# Altium PCB DE-060418.PcbDoc
Units mm, origin at the board's own origin, x right, y up, seen from the top; angles counter-clockwise.
Board outline 40 x 60 mm, 2 copper layers (Top Layer, Bottom Layer); 53 components, 43 nets, 141 pads, 14 vias.
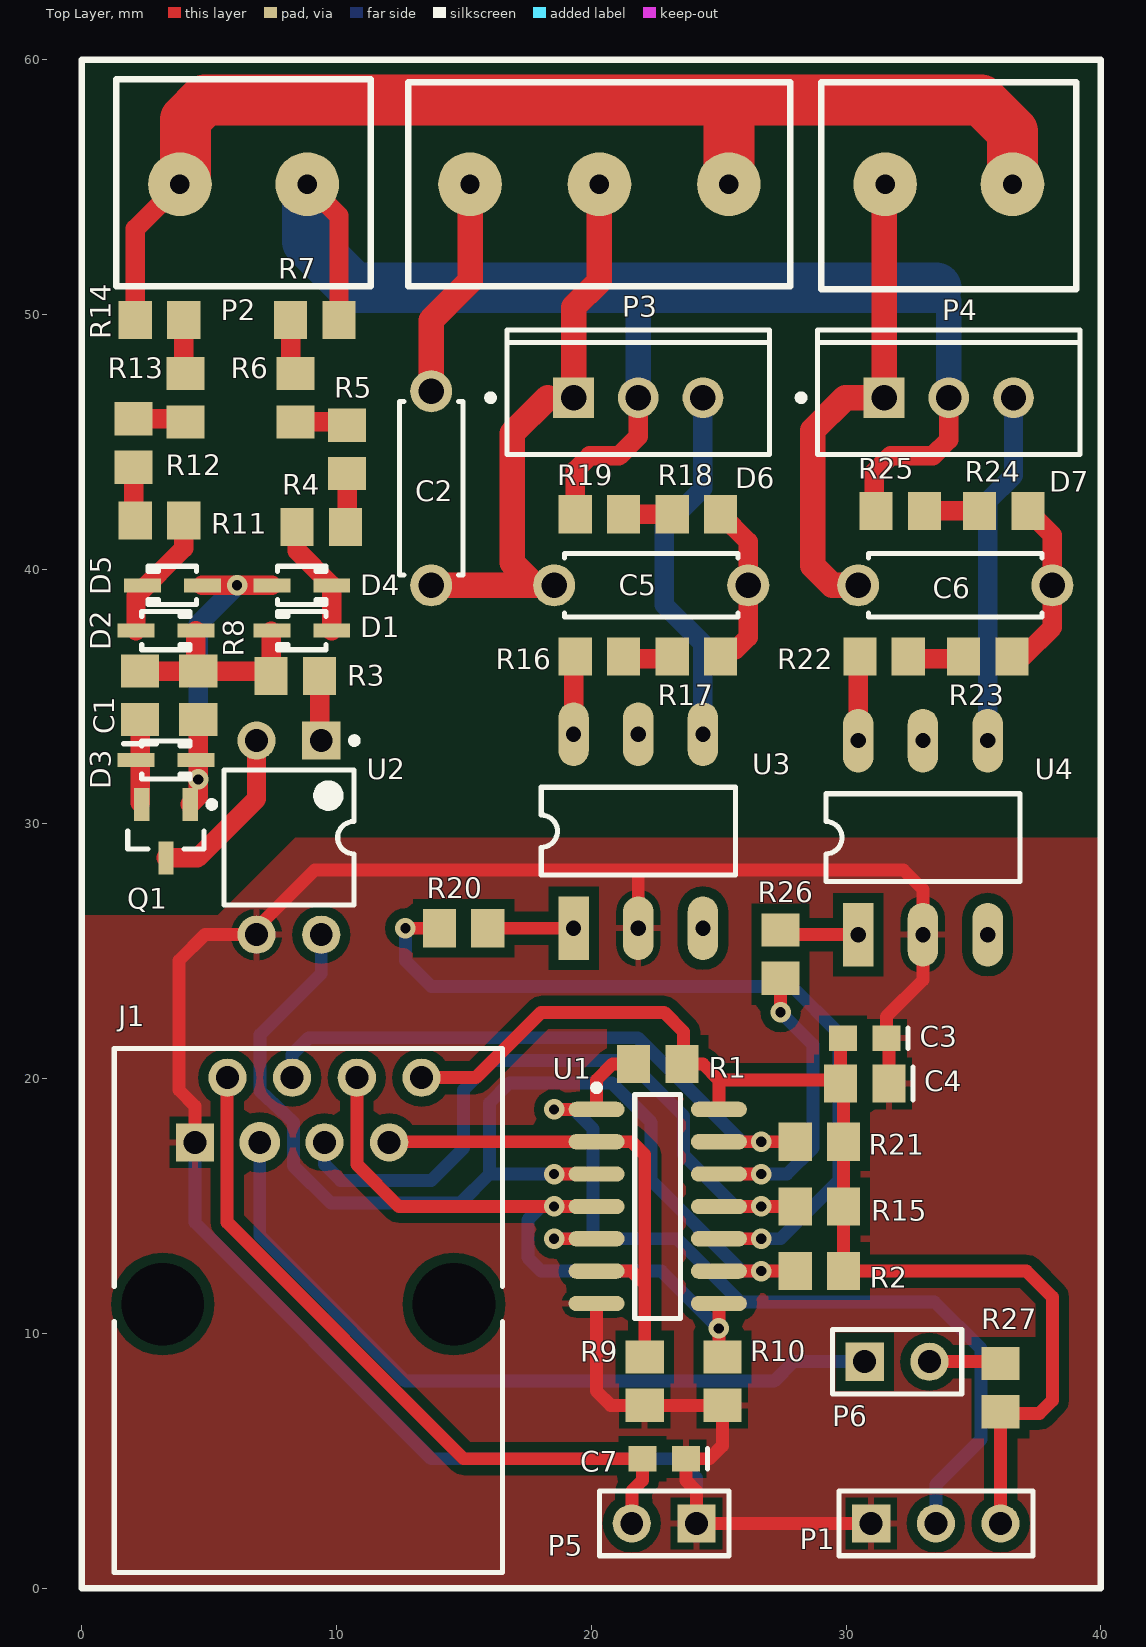
[diagram p0: Top Layer view]
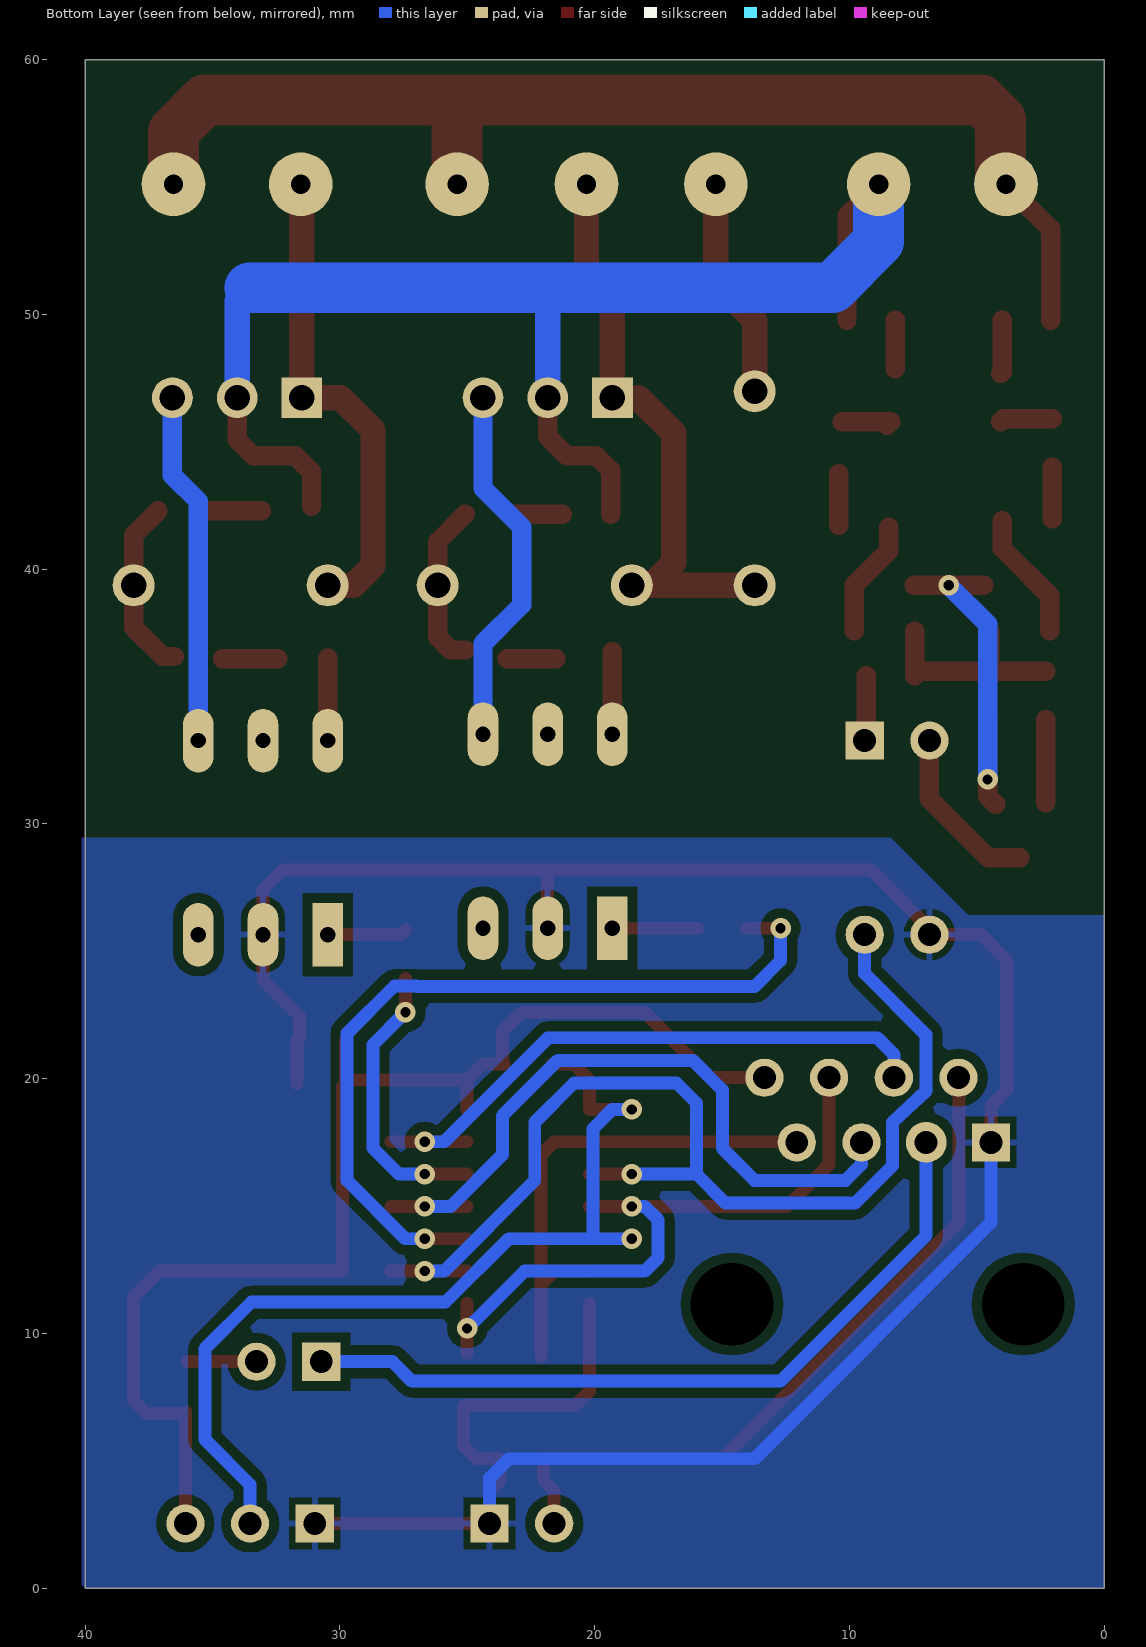
[diagram p1: Bottom Layer view, seen from below]

## Layer stack, top to bottom
Top Solder: solder mask 0.0102, Solder Resist, Dk 3.5
Top Layer: signal copper 0.0356
Dielectric 1: dielectric 0.32, FR-4, Dk 4.8
Bottom Layer: signal copper 0.0356
Bottom Solder: solder mask 0.0102, Solder Resist, Dk 3.5

## Board outline
0,0 0,60 40,60 40,0

## Design rules (kind name [scope] priority, off if disabled: settings)
Clearance [All] p1: gap=0.381
HoleSize [All] p1: absolutevalues=TRUE maxlimit=2.54 minlimit=0.4 maxpercent=80.000 minpercent=20.000
PlaneClearance [All] p1: clearance=0.635
PolygonConnect [All] p1: connectstyle=Relief reliefconductorwidth=0.254 reliefentries=4 polygonreliefangle="90 Angle" airgapwidth=0.254
RoutingVias [All] p1: holewidth=0.711 width=1.27 viastyle="Through Hole" minholewidth=0.711 minwidth=1.27 maxholewidth=0.711 maxwidth=1.27
SolderMaskExpansion [All] p1: expansion=0.102
Width [All] p1: maxlimit=5.08 minlimit=0.254 preferedwidth=0.762
28 further rules are at their usual default settings.

## Components (designator, comment, footprint, x,y, rotation, side; value= is the part's Value field where it differs from the comment)
C1 "4u7" 0805 2.286,35.052 r90 top
C2 "47nF/X2" VP52-2.5 13.716,43.18 r90 top
C3 "100nF" 0603 30.734,21.59 r180 top
C4 "4u7" 0805 30.734,19.812 r180 top
C5 "47nF/X2" VP52-2.5 22.352,39.37 r0 top
C6 "47nF/X2" VP52-2.5 34.29,39.37 r0 top
C7 "100nF" 0603 22.86,5.08 r180 top
D1 "1N4148" SOD323 8.636,37.592 r180 top
D2 "1N4148" SOD323 3.302,37.592 r0 top
D3 "1N4148" SOD323 3.302,32.512 r0 top
D4 "1N4148" SOD323 8.636,39.37 r0 top
D5 "1N4148" SOD323 3.556,39.37 r180 top
D6 "BTA16-600" ONSC-TO-220-3-221A-07 21.844,46.736 r90 top
D7 "BTA16-600" ONSC-TO-220-3-221A-07 34.036,46.736 r90 top
J1 "THERMOSTAT" 15-43-8501 8.89,0.61 r0 top
P1 "MOTOR_RPM_SENSOR" HDR1X3 30.988,2.54 r0 top
P2 "220VAC" "TERMINAL BLOK 2" 6.35,55.118 r90 top
P3 "FAN_MOTOR" "TERMINAL BLOK 3" 20.32,55.118 r90 top
P4 "COOLING_VALVE" "TERMINAL BLOK 2" 34.036,55.118 r270 top
P5 "NTC_2K_FANCOIL" HDR1X2 24.13,2.54 r180 top
P6 "STATUS_LED" HDR1X2 30.734,8.89 r0 top
Q1 "BC817" SOT23_N 3.302,29.718 r270 top
R1 "1K" 6-0805 22.606,20.574 r180 top
R2 "1K" 6-0805 28.956,12.446 r180 top
R3 "1K" 6-0805 8.382,35.814 r180 top
R4 "56K" 6-0805 9.398,41.656 r0 top
R5 "56K" 6-0805 10.414,44.704 r90 top
R6 "56K" 6-0805 8.382,46.736 r90 top
R7 "56K" 6-0805 9.144,49.784 r0 top
R8 "10K" 6-0805 4.572,35.052 r90 top
R9 "220R" 6-0805 22.098,8.128 r270 top
R10 "220R" 6-0805 25.146,8.128 r270 top
R11 "56K" 6-0805 3.048,41.91 r180 top
R12 "56K" 6-0805 2.032,44.958 r90 top
R13 "56K" 6-0805 4.064,46.736 r90 top
R14 "56K" 6-0805 3.048,49.784 r180 top
R15 "1K" 6-0805 28.956,14.986 r180 top
R16 "220R" 6-0805 20.32,36.576 r0 top
R17 "220R" 6-0805 24.13,36.576 r0 top
R18 "220R" 6-0805 24.13,42.164 r180 top
R19 "220R" 6-0805 20.32,42.164 r180 top
R20 "220R" 6-0805 14.986,25.908 r180 top
R21 "1K" 6-0805 28.956,17.526 r180 top
R22 "220R" 6-0805 31.496,36.576 r0 top
R23 "220R" 6-0805 35.56,36.576 r0 top
R24 "220R" 6-0805 36.195,42.291 r180 top
R25 "220R" 6-0805 32.131,42.291 r180 top
R26 "220R" 6-0805 27.432,24.892 r270 top
R27 "220R" 6-0805 36.068,7.874 r90 top
U1 "74AC14SC" M14A_N 22.606,14.986 r0 top
U2 "PC817" DIP-4 8.128,29.464 r270 top
U3 "MOC3052" DIP6 19.304,25.908 r90 top
U4 "MOC3083" DIP6 30.48,25.654 r90 top

## Footprints (in the part's own frame and the unit in brackets; to place one, negate y for a bottom-side part, rotate by r counter-clockwise, add the part's x,y. Pads: shape width x height; smd on the part's side, far side on the other; paste and mask are expansions set on the pad)
6-0805 [mm] "Chip Resistor; Body 2 x 1.2 mm (LxW typ)"
  rect 1.3x1.5 smd: 1(-0.95,0) 2(0.95,0)
15-43-8501 [mm] "Connector; PCB Jack, Thru-Hole; 1-Port; Unshielded without Lightpipes; Right Angle"
  rect 1.5x1.5 hole 0.9: 1(-4.445,16.89)
  round 1.5 hole 0.9: 2(-3.175,19.43) 4(-0.635,19.43) 5(0.635,16.89) 6(1.905,19.43) 7(3.175,16.89) 8(4.445,19.43)
  round 1.6 hole 0.9: 3(-1.905,16.89)
  round 2.95 hole 3.25 unplated: MH1(-5.715,10.54) MH2(5.715,10.54)
  silkscreen extent -7.62,0 7.62,20.58
0603 [mm] "Chip Capacitor; Body 1.6 x 0.8 mm (LxW typ)"
  rect 1.1x1 smd: 1(-0.85,0) 2(0.85,0)
  silkscreen extent -1.7,-0.4 -1.7,0.4
0805 [mm] "Chip Capacitor; Body 2.0 x 1.2 mm (LxW typ)"
  rect 1.3x1.5 smd: 1(-0.95,0) 2(0.95,0)
  silkscreen extent -1.9,-0.65 -1.9,0.65
DIP6 [mm]
  rect 2.5x1.2 hole 0.6: 1(0,0)
  oval 2.5x1.2 hole 0.6: 2(0,-2.54) 3(0,-5.08) 4(7.62,-5.08) 5(7.62,-2.54) 6(7.62,0)
  silkscreen extent 2.08,-6.35 5.54,1.27, body extent 0.63,-6.48 6.98,1.27, height 1
DIP-4 [mm] "DIP; 4 Leads; Row Spacing 7.62 mm; Pitch 2.54 mm"
  rect 1.5x1.5 hole 0.9: 1(-3.81,1.27)
  round 1.5 hole 0.9: 2(-3.81,-1.27) 3(3.81,-1.27) 4(3.81,1.27)
  silkscreen extent -3.93,-2.55 2.65,2.7, body extent -3.15,-2.5 3.15,2.5, height 5.6
HDR1X2 [mm] "Connector; Header; 2 Position"
  rect 1.5x1.5 hole 0.9: 1(0,0)
  round 1.5 hole 0.9: 2(2.54,0)
  silkscreen extent -1.27,-1.27 3.81,1.27
HDR1X3 [mm] "Connector; Header; 3 Position"
  rect 1.5x1.5 hole 0.9: 1(0,0)
  round 1.5 hole 0.9: 2(2.54,0) 3(5.08,0)
  silkscreen extent -1.27,-1.27 6.35,1.27
M14A_N [mm] "SOIC, 14-Leads, Body 8.6x3.9mm, Pitch 1.27mm, IPC Medium Density"
  oval 2.2x0.6 smd: 1(-2.4,3.81) 2(-2.4,2.54) 3(-2.4,1.27) 4(-2.4,0) 5(-2.4,-1.27) 6(-2.4,-2.54) 7(-2.4,-3.81) 8(2.4,-3.81) 9(2.4,-2.54) 10(2.4,-1.27) 11(2.4,0) 12(2.4,1.27) 13(2.4,2.54) 14(2.4,3.81)
  silkscreen extent -2.52,-4.4 0.9,4.78, body extent -2,-4.38 2,4.38, height 1.75
ONSC-TO-220-3-221A-07 [mm] "FM, 3-Leads, Body 10.3x4.85mm, Pitch 2.54mm"
  rect 1.6x1.6 hole 1: 1(0,2.54)
  round 1.6 hole 1: 2(0,0) 3(0,-2.54)
  silkscreen extent -2.23,-5.15 2.67,5.92, body extent -2.21,-5.15 2.64,5.15, height 19.68
SOD323 [mm] "SOD-323/SC-76; 2 Leads; Body 1.7 x 1.3 mm, (LxW)"
  rect 1.45x0.55 smd: 1(1.175,0) 2(-1.175,0)
  silkscreen extent -0.95,-0.75 0.95,0.75
SOT23_N [mm] "SOT23, 3-Leads, Body 2.9x1.3mm, Pitch 0.95mm, Lead Span 2.3mm, IPC Medium Density"
  rect 1.3x0.6 smd: 1(-1.05,0.95) 2(-1.05,-0.95) 3(1.05,0)
  silkscreen extent -1.17,-1.5 0.7,1.93, body extent -0.7,-1.5 0.7,1.5, height 1.1
"TERMINAL BLOK 2" [mm] "Terminal blok 3,5mm"
  round 2.5 hole 0.762: 1(0,-2.5) 2(0,2.5)
  silkscreen extent -4,-5 4.13,5
"TERMINAL BLOK 3" [mm] "Terminal blok konektor 3 pina"
  round 2.5 hole 0.762: 1(0,5.08) 2(0,0) 3(0,-5.08)
  silkscreen extent -4,-7.5 4,7.5
VP52-2.5 [mm] "Capacitor, Ceramic, Thru-Hole, Dipped Radial; Body 6.8 x 2.5 mm (WxT) Pin Spacing 7.62 mm (typ)"
  round 1.65 hole 1: 1(-3.81,0) 2(3.81,0)
  silkscreen extent -3.4,-1.25 3.4,1.25

## Part data
C1 C4: library part C0805, "Ceramic Chip Capacitor - Standard"
C2 C5 C6: library part VP52BA103, "Dipped Radial Multilayer Ceramic Capacitor COG (NPO): 10nF"
C3 C7: library part C0603, "Ceramic Chip Capacitor - Standard"
D1 D2 D3 D4 D5: library part BAS321, "General-purpose Diode"
D6 D7: library part BTA08-600BW3G, "Triacs, Silicon Bidirectional Thyristor, 3-Pin TO-220, Pb-Free, Tube"
J1: library part 15-43-8501, "Right Angle, Standard Profile, RJ-45 Keyed, Unshielded PCB Jack"
P1: library part "Header 3", "Header, 3-Pin"
P2 P4: library part "TERMINAL BLOK 2", "Terminal blok konektor 3,5 mm"
P3: library part "TERMINAL BLOK 3", "3 pinski terminal blok konektor"
P5 P6: library part "Header 2", "Header, 2-Pin"
Q1: "NPN General-purpose Transistor"
R1 R2 R3 R4 R5 R6 R7 R8 R9 R10 R11 R12 R13 R14 R15 R16 R17 R18 R19 R20 R21 R22 R23 R24 R25 R26 R27: library part ERJ6BQ, "Low Ohmic Value Thick Film Chip Resistor, 0.22 Ohm to 9.1 Ohm Range, 1%, 2% and 5% Tolerance, 0805 Size, 0.25 W"
U1: "Hex Schmitt-Trigger Inverter, 14-Pin SOIC, Commercial Grade"
U2: library part Optoisolator1, "4-Pin Phototransistor Optocoupler"
U3 U4: library part MOC3081, "Zero-Cross Optoisolator Triac Driver"

## Via types
v1: diameter 0.8, hole 0.4, Top Layer to Bottom Layer, 14 vias

## Nets (pads, with @x,y where several pads share a name; then routed paths per layer and width w, separated by ;. In a path a pad name is that pad's centre, name@x,y a point inside that pad or via, vN(x,y) a via of type N, cw(c..) or ccw(c..) an arc to the next point about the centre after c; other vN are vias at no path point)
FANCOIL_NTC: C7.2 J1.2 P5.2 | length 28.5
  Top Layer w0.508: J1.2@5.703,20.04 5.703,14.363 14.986,5.08 C7.2 22.01,4.23 21.59,3.81 P5.2
LIVE: D6.2 D7.2 P2.1 R7.2 R19.2 R25.2 | length 55.1
  Top Layer w0.762: P2.1 10.094,53.874 R7.2 ; R19.2 19.37,43.881 19.939,44.45 21.082,44.45 21.844,45.212 D6.2 ; R25.2@31.115,42.479 31.115,43.815 31.75,44.45 33.401,44.45 34.036,45.085 D7.2
  Bottom Layer w1: D6.2 21.844,51.054 ; 33.528,51.054 34.036,50.546 D7.2
  Bottom Layer w2: P2.1 8.85,52.872 10.668,51.054 21.844,51.054 33.528,51.054
MOTOR_RPM: J1.7 R9.1 U1.2 U1.6 | length 20.3
  Top Layer w0.508: J1.7@12.091,17.526 U1.2 21.59,17.526 22.098,17.018 22.098,11.938 ; U1.6 21.59,12.446 22.098,11.938 ; R9.1 22.098,11.938
MOTOR_TRIAC: J1.5 R15.2 U1.11 | length 27.8
  Top Layer w0.508: U1.11 v1(26.67,14.986) R15.2
  Bottom Layer w0.508: J1.5 9.525,16.637 10.16,16.002 13.716,16.002 14.986,17.272 14.986,19.558 16.148,20.72 21.444,20.72 23.622,18.542 23.622,17.018 25.654,14.986 v1(26.67,14.986)
NetC1_1: C1.1 D3.2 Q1.2 | length 3.3
  Top Layer w0.762: Q1.2@2.286,30.834 C1.1
NetC1_2: C1.2 D1.1 D2.1 R3.2 R8.2 | length 8.2
  Top Layer w0.762: C1.2 R8.2 R3.2@7.244,36.002 ; R8.2@4.477,36.097 D2.1 ; R3.2 D1.1@7.432,37.563
NetC2_1: C2.1 C5.1 D6.1 P3.2 | length 23.7
  Top Layer w0.762: 18.288,46.736 D6.1
  Top Layer w1: C2.1 C5.1 17.78,39.37 16.891,40.259 16.891,45.339 18.288,46.736 ; D6.1 19.304,50.292 20.32,51.308 P3.2
NetC2_2: C2.2 P3.1 | length 8.8
  Top Layer w1: C2.2 13.716,49.784 15.24,51.308 P3.1
NetC5_2: C5.2 R17.2 R18.1 | length 6.6
  Top Layer w0.762: R17.2@25.08,36.83 25.654,36.83 26.162,37.338 C5.2 26.162,41.082 R18.1
NetC6_1: C6.1 D7.1 P4.1 | length 19.1
  Top Layer w0.762: P4.1@31.496,55.078 P4.1
  Top Layer w1: C6.1 29.464,39.37 28.702,40.132 28.702,45.466 29.972,46.736 D7.1 P4.1@31.496,55.078
NetC6_2: C6.2 R23.2 R24.1 | length 7
  Top Layer w0.762: R23.2 36.957,36.576 38.1,37.719 C6.2 38.1,41.336 R24.1
NetD1_2: D1.2 D4.1 R4.1 | length 4.6
  Top Layer w0.762: R4.1 8.448,40.733 D4.1 D1.2
NetD2_2: D2.2 D5.1 R11.1 | length 5.1
  Top Layer w0.762: D2.2 2.127,38.957 3.998,40.828 R11.1
NetD3_1: D3.1 D4.2 D5.2 Q1.1 R8.1 | length 14.4
  Top Layer w0.762: Q1.1 4.572,31.088 v1(4.572,31.75) R8.1 ; D5.2 v1(6.096,39.37) D4.2
  Bottom Layer w0.762: v1(4.572,31.75) 4.572,37.846 v1(6.096,39.37)
NetD6_3: D6.3 U3.4 | length 14.5
  Bottom Layer w0.762: U3.4 24.384,37.084 22.86,38.608 22.86,41.656 24.384,43.18 D6.3
NetD7_3: D7.3 U4.4 | length 13.9
  Bottom Layer w0.762: U4.4 35.56,42.672 36.576,43.688 D7.3
NetP1_2: P1.2 R1.2 U1.1 U1.5 | length 40
  Top Layer w0.508: v1(18.542,13.716) U1.5 ; v1(18.542,18.796) U1.1 20.206,19.952 20.828,20.574 R1.2
  Bottom Layer w0.508: v1(18.542,18.796) 19.304,18.796 20.066,18.034 20.066,13.716 v1(18.542,13.716) 23.368,13.716 25.852,11.232 33.472,11.232 35.306,9.398 35.306,5.842 33.528,4.064 P1.2
NetP6_2: P6.2 R27.2 | length 2.7
  Top Layer w0.508: P6.2 R27.2@36.002,8.89
NetQ1_3: Q1.3 U2.2 | length 6.8
  Top Layer w0.762: Q1.3 4.538,28.668 6.858,30.988 U2.2
NetR2_2: R2.2 U1.3 U1.9 U2.4 | length 44.8
  Top Layer w0.508: v1(18.542,16.256) U1.3 ; U1.9 v1(26.67,12.446) R2.2
  Bottom Layer w0.508: U2.4 9.398,24.13 6.997,21.729 6.997,19.519 8.305,18.288 8.305,16.587 9.779,15.113 14.859,15.113 16.002,16.256 ; v1(18.542,16.256) 16.002,16.256 ; v1(26.67,12.446) 25.908,12.446 22.352,16.002 22.352,18.288 20.809,19.831 16.783,19.831 16.002,19.05 16.002,16.256
NetR3_1: R3.1 U2.1 | length 2.5
  Top Layer w0.762: U2.1@9.332,33.34 R3.1
NetR4_2: R4.2 R5.1 | length 2
  Top Layer w0.762: R4.2@10.414,41.722 R5.1
NetR5_2: R5.2 R6.1 | length 2.1
  Top Layer w0.762: R6.1@8.514,45.654 R6.1 R5.2@10.282,45.786
NetR6_2: R6.2 R7.1 | length 1.9
  Top Layer w0.762: R6.2@8.194,47.874 R7.1
NetR11_2: R11.2 R12.1 | length 2
  Top Layer w0.762: R11.2@2.032,41.976 R12.1
NetR12_2: R12.2 R13.1 | length 2.1
  Top Layer w0.762: R12.2 3.942,45.908 R13.1
NetR13_2: R13.2 R14.1 | length 2.1
  Top Layer w0.762: R14.1 3.998,47.752 R13.2
NetR16_1: R16.1 U3.6 | length 3.2
  Top Layer w0.762: U3.6 R16.1@19.304,36.764
NetR16_2: R16.2 R17.1 | length 1.9
  Top Layer w0.762: R16.2@21.524,36.486 R17.1@23.434,36.486
NetR18_2: R18.2 R19.1 | length 1.9
  Top Layer w0.762: R19.1 R18.2
NetR20_1: R20.1 U3.1 | length 3.4
  Top Layer w0.508: R20.1 U3.1
NetR20_2: R20.2 U1.10 | length 32.3
  Top Layer w0.508: v1(12.7,25.908) R20.2 ; U1.10 v1(26.67,13.716)
  Bottom Layer w0.508: v1(12.7,25.908) 12.7,24.638 13.716,23.622 26.984,23.622 27.003,23.641 27.861,23.641 29.718,21.784 29.718,16.002 27.432,13.716 v1(26.67,13.716)
NetR22_1: R22.1 U4.6 | length 3.2
  Top Layer w0.762: U4.6 R22.1@30.48,36.51
NetR22_2: R22.2 R23.1 | length 2.2
  Top Layer w0.762: R22.2@32.446,36.486 R23.1@34.61,36.486
NetR24_2: R24.2 R25.1 | length 2.2
  Top Layer w0.762: R25.1 R24.2
NetR26_1: R26.1 U4.1 | length 3.1
  Top Layer w0.508: R26.1 27.62,25.654 U4.1
NetR26_2: R26.2 U1.12 | length 11.3
  Top Layer w0.508: U1.12 v1(26.67,16.256) ; v1(27.432,22.606) R26.2
  Bottom Layer w0.508: v1(26.67,16.256) 27.686,16.256 28.702,17.272 28.702,21.336 v1(27.432,22.606)
NEUTRAL: P2.2 P3.3 P4.2 R14.2 | length 47.4
  Top Layer w0.762: R14.2 2.098,53.366 P2.2 P2.2@4.064,55.332
  Top Layer w2: P2.2@4.064,55.332 4.064,57.658 4.826,58.42 25.4,58.42 ; P3.3 25.4,58.42 ; P4.2 36.536,57.19 35.306,58.42 25.4,58.42
STATUS_LED: J1.3 P6.1 | length 30.1
  Bottom Layer w0.508: J1.3 6.985,13.843 12.7,8.128 27.178,8.128 27.94,8.89 P6.1
VALVE_TRIAC: J1.4 R21.2 U1.13 | length 24.3
  Top Layer w0.508: U1.13 v1(26.67,17.526) R21.2
  Bottom Layer w0.508: J1.4 8.255,20.955 8.909,21.609 21.825,21.609 25.908,17.526 v1(26.67,17.526)
VDD: C3.2 C4.2 J1.8 P1.3 R1.1 R2.1 R15.1 R21.1 R27.1 U1.14 | length 48.9
  Top Layer w0.508: J1.8 15.468,20.04 18.034,22.606 22.86,22.606 23.622,21.844 23.622,20.64 R1.1 24.384,20.574 25.006,19.952 ; U1.14 25.006,19.952 ; C3.2@29.784,21.49 C4.2 29.644,19.952 25.006,19.952 ; C4.2@29.906,19.69 R21.1 R15.1 R2.1 37.084,12.446 38.1,11.43 38.1,7.366 37.592,6.858 36.134,6.858 R27.1 P1.3
VSS: C3.1 C4.1 C7.1 J1.1 P1.1 P5.1 R9.2 R10.2 U1.7 U2.3 U3.2 U4.2 | length 99.1
  Top Layer w0.508: J1.1 4.445,18.923 3.81,19.558 3.81,24.638 4.826,25.654 U2.3 6.858,25.908 9.144,28.194 21.844,28.194 ; U1.7 20.206,7.734 20.762,7.178 R9.2 R10.2 25.146,5.588 24.638,5.08 C7.1 23.71,4.23 24.13,3.81 P5.1 P1.1 ; U3.2 21.844,28.194 ; C3.1 31.584,22.44 33.02,23.876 U4.2 33.02,27.432 32.258,28.194 21.844,28.194 ; C4.1 C3.1@31.684,21.49
  Bottom Layer w0.508: J1.1 4.445,14.351 13.716,5.08 23.368,5.08 24.13,4.318 P5.1
ZERO_CROSS: J1.6 R10.1 U1.4 U1.8 | length 26.8
  Top Layer w0.508: J1.6 10.795,16.637 12.446,14.986 v1(18.542,14.986) U1.4 ; R10.1@25.006,9.218 U1.8
  Bottom Layer w0.508: v1(18.542,14.986) 18.034,14.986 17.507,14.459 17.507,12.973 18.034,12.446 22.757,12.446 v1(25.006,10.197)
pads on no net: J1.MH1 J1.MH2 U3.3 U3.5 U4.3 U4.5

## Polygon pours and split planes (outlines as drawn)
VSS on Top Layer "Top Layer-No Net" (solid, remove dead copper, pour order 2): 0,26.416 5.334,26.416 8.382,29.464 39.878,29.464 40,29.342 40,0 0,0
VSS on Bottom Layer "Top Layer-No Net" (solid, remove dead copper, pour order 4): 0,26.416 5.334,26.416 8.382,29.464 40.132,29.464 40.132,0.132 40,0 0,0 0,26.416

## Silkscreen, mask and mechanical layers (free items; w line width, h text height)
Top Overlay:
  the board outline again, w0.254